# Allegro board IRCamPwr.brd
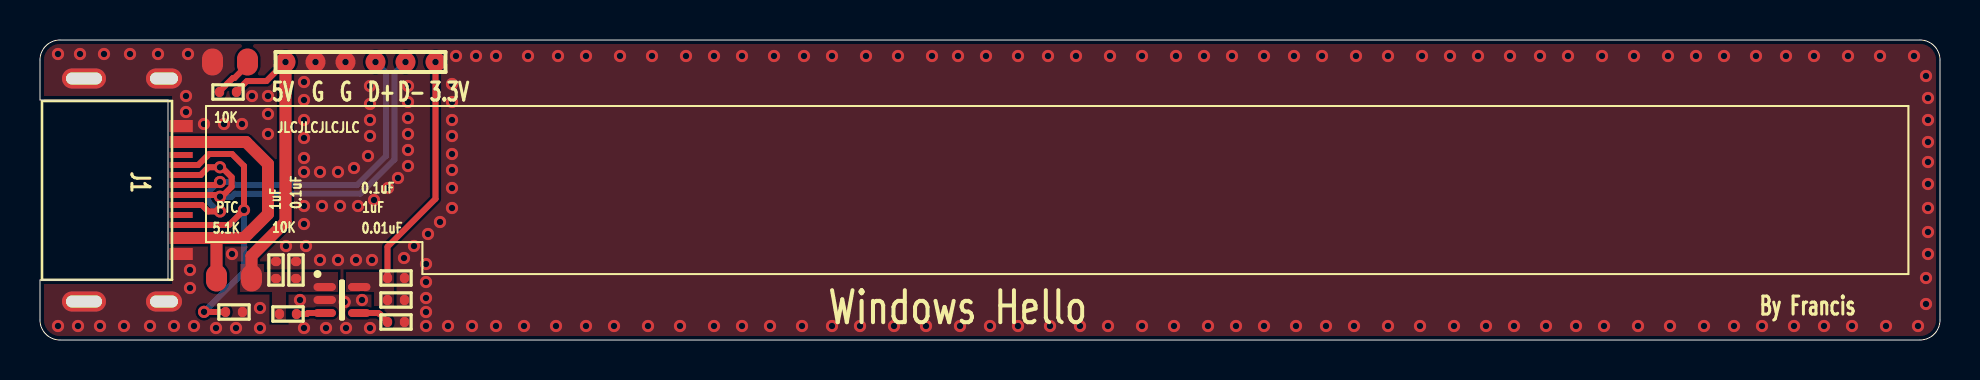
[diagram p0: board, top side]
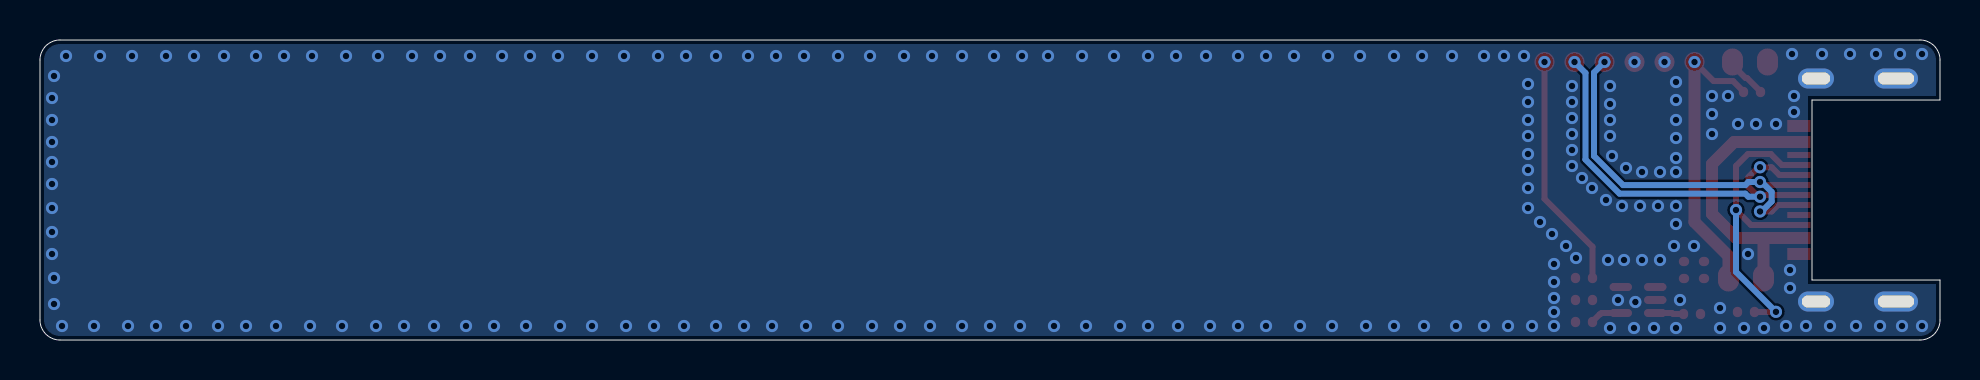
[diagram p1: board, bottom side, seen from below]

Outline 95 x 15 mm; copper layers: TOP, BOTTOM. Coordinates in mm from the lower left corner of the outline.
Outline path: 0,14 0,12 6.4,12 6.4,3 0,3 0,1 arc(0.29,0.29) 1,0 94,0 arc(94.71,0.29) 95,1 95,14 arc(94.71,14.71) 94,15 1,15 arc(0.29,14.71) 0,14

## Design rules (mm)
constraint set DEFAULT: min track width 0.127

## Placement (name value [footprint] x y rotation side)
C1  1uF  [D-0402-C]  11.8 3.5 90 top
C2  0.1uF  [D-0402-C]  12.8 3.5 90 top
C3  0.1uF  [D-0402-C]  17.8 3.1 0 top
C4  1uF  [D-0402-C]  17.8 2 0 top
C5  0.01uF  [D-0402-C]  17.8 0.9 0 top
D1  LED  [D-0805-C]  9.5 13.9 0 top
J1  TYPE-C  [TYPE-C-16PIN-CHENBAN1P6]  4.2 7.5 270 top
J2  HEADER 6  [D-PINPITCH1P5-6PIN_PAD]  12.28 13.9 180 top
R1  5.1k  [D-0402-R]  9.7 1.4 0 top
R2  10K  [D-0402-R]  9.4 12.4 0 top
R3  10K  [D-0402-R]  12.4 1.3 180 top
RT1  PTC  [D-0805-C]  9.7 3.1 0 top
U1  SGM2019-3.3  [D-SC70-5]  15.1 2 0 top

## Library data of the parts
C1-C5 = CAP NP
D1 = LED
J1 = TYPE-C_2
J2 = HEADER 6
R1-R3 = R_0
RT1 = PTC
U1 = SGM2019-3.0

## Footprints (pads in the part's own frame, mm; a bottom-side part is the same pattern mirrored in y, then rotated)
D-0402-C
  oval 0.465x0.52 smd: 1(-0.425,0) 2(0.425,0)
D-0402-R
  oval 0.465x0.52 smd: 1(-0.425,0) 2(0.425,0)
D-0805-C
  oval 1.05x1.35 smd: 1(-0.875,0) 2(0.875,0)
D-PINPITCH1P5-6PIN_PAD
  round 1 smd: 1(0,0) 2(-1.5,0) 3(-3,0) 4(-4.5,0) 5(-6,0) 6(-7.5,0)
D-SC70-5
  oval 1.125x0.4 smd: 1(-0.863,0.65) 2(-0.863,0) 3(-0.863,-0.65) 4(0.863,-0.65) 5(0.862,0.65)
TYPE-C-16PIN-CHENBAN1P6
  rect 0.6x1.15 smd: A1(-3.2,2.86) A4(-2.4,2.86) B1(3.2,2.86) B4(2.4,2.86)
  rect 0.3x1.15 smd: A5(-1.25,2.86) A6(-0.25,2.86) A7(0.25,2.86) A8(1.25,2.86) B5(1.75,2.86) B6(0.75,2.86) B7(-0.75,2.86) B8(-1.75,2.86)
  oval 1x1.8 hole 0.6x1.4: M1(-5.575,2) M2(5.575,2)
  oval 1x2.2 hole 0.6x1.8: M3(-5.575,-2) M4(5.575,-2)

## Nets
GND: C1.2 C2.2 C3.2 C4.2 C5.2 D1.1(CATHODE) J1.A1 J1.B1 J1.M1 J1.M2 J1.M3 J1.M4 J2.2 J2.3 R1.2 U1.2
VBUS: J1.A4 J1.B4(VBUS2) RT1.1
VCC3V3: C3.1 C4.1 J2.6 U1.5(OUT)
VCC5: C1.1 C2.1 J2.1 R2.2 R3.2 RT1.2 U1.1
CC: J1.A5 J1.B5 R1.1
D+: J1.A6 J1.B6 J2.4
D-: J1.A7 J1.B7 J2.5
N642090: R3.1 U1.3
N642094: C5.1 U1.4
N6603590: D1.2 R2.1

Pads without a net: J1 A8 B8

## Via types
v1: diameter 0.61, hole 0.33, TOP to BOTTOM, 208 vias

## Routing (per net, layer and track width the routed paths; a pad name or vN(x,y) marks a point on that pad's centre or on a via; arc(x,y) is an arc through that point)
GND:
  vias: v1(0.9,14.3) v1(0.9,0.7) v1(1.9,0.7) v1(2,14.3) v1(3,0.7) v1(3.2,14.3) v1(4.2,0.7) v1(4.5,14.3) v1(5.5,0.7) v1(5.9,14.3) v1(6.7,0.7) v1(7.3,12.2) v1(7.3,11.4) v1(7.4,14.3) v1(7.5,3.5) v1(7.5,2.6) v1(7.7,0.7) v1(8.2,10.8) v1(8.8,0.6) v1(9.2,10.8) v1(9.6,4.3) v1(9.8,0.6) v1(10.1,10.8) v1(10.6,12.2) v1(11,1.6) v1(11,0.6) v1(11.4,12.2) v1(11.4,11.3) v1(11.4,10.3) v1(12.3,4.7) v1(13,2) v1(13.2,12.9) v1(13.2,12) v1(13.2,11) v1(13.2,10.1) v1(13.2,9.1) v1(13.2,8.4) v1(13.2,6.7) v1(13.2,5.8) v1(13.2,0.6) v1(13.3,4.7) v1(13.78,13.9) v1(14,8.4) v1(14,4) v1(14.1,6.7) v1(14.3,0.6) v1(14.9,8.4) v1(14.9,4) v1(15,6.7) v1(15.23,1.9) v1(15.28,13.9) v1(15.3,0.6) v1(15.7,8.6) v1(15.8,4) v1(15.9,6.7) v1(16.1,2) v1(16.4,9.2) v1(16.5,12.7) v1(16.5,11.8) v1(16.5,11) v1(16.5,10.2) v1(16.5,0.6) v1(16.6,4) v1(16.7,7) v1(17.4,7.6) v1(17.9,8.1) v1(18.2,4.1) v1(18.4,12.7) v1(18.4,11.9) v1(18.4,11.1) v1(18.4,10.3) v1(18.4,9.5) v1(18.4,8.7) v1(18.7,4.7) v1(19.3,3.8) v1(19.3,2.9) v1(19.3,2.1) v1(19.3,1.4) v1(19.3,0.7) v1(19.4,5.3) v1(20,5.9) v1(20.4,0.7) v1(20.6,12.8) v1(20.6,11.9) v1(20.6,11) v1(20.6,10.2) v1(20.6,9.3) v1(20.6,8.5) v1(20.6,7.6) v1(20.6,6.6) v1(20.8,14.2) v1(21.6,0.7) v1(21.8,14.2) v1(22.8,14.2) v1(22.8,0.7) v1(24.2,0.7) v1(24.4,14.2) v1(25.8,0.7) v1(25.9,14.2) v1(27.3,14.2) v1(27.3,0.7) v1(28.7,0.7) v1(29,14.2) v1(30.4,0.7) v1(30.6,14.2) v1(32,0.7) v1(32.3,14.2) v1(33.7,14.2) v1(33.7,0.7) v1(35.1,14.2) v1(35.1,0.7) v1(36.5,0.7) v1(36.7,14.2) v1(38.1,0.7) v1(38.2,14.2) v1(39.6,14.2) v1(39.6,0.7) v1(41,0.7) v1(41.3,14.2) v1(42.7,0.7) v1(42.9,14.2) v1(44.3,0.7) v1(44.6,14.2) v1(45.9,14.2) v1(46,0.7) v1(47.3,14.2) v1(47.5,0.7) v1(48.9,14.2) v1(48.9,0.7) v1(50.4,14.2) v1(50.5,0.7) v1(51.8,14.2) v1(52,0.7) v1(53.4,0.7) v1(53.5,14.2) v1(55.1,14.2) v1(55.1,0.7) v1(56.7,0.7) v1(56.8,14.2) v1(58.2,14.2) v1(58.4,0.7) v1(59.6,14.2) v1(59.8,0.7) v1(61.2,14.2) v1(61.2,0.7) v1(62.7,14.2) v1(62.8,0.7) v1(64.1,14.2) v1(64.3,0.7) v1(65.7,0.7) v1(65.8,14.2) v1(67.4,14.2) v1(67.4,0.7) v1(69,0.7) v1(69.1,14.2) v1(70.5,14.2) v1(70.7,0.7) v1(71.9,14.2) v1(72.3,0.7) v1(73.5,14.2) v1(73.7,0.7) v1(75,14.2) v1(75.3,0.7) v1(76.4,14.2) v1(76.8,0.7) v1(78.1,14.2) v1(78.2,0.7) v1(79.7,14.2) v1(79.9,0.7) v1(81.4,14.2) v1(81.5,0.7) v1(82.8,14.2) v1(83.2,0.7) v1(84.2,14.2) v1(84.7,0.7) v1(85.8,14.2) v1(86.1,0.7) v1(87.3,14.2) v1(87.7,0.7) v1(88.7,14.2) v1(89.2,0.7) v1(90.4,14.2) v1(90.6,0.7) v1(92,14.2) v1(92.3,0.7) v1(93.7,14.2) v1(93.9,0.7) v1(94.3,13.2) v1(94.3,3.1) v1(94.3,1.8) v1(94.4,12.1) v1(94.4,11) v1(94.4,9.9) v1(94.4,8.9) v1(94.4,7.8) v1(94.4,6.6) v1(94.4,5.4) v1(94.4,4.3)
VBUS: length 14.1
  TOP w0.6: J1.A4 10.3,9.9 11.4,8.8 11.4,6.3 10.2,5.1 8.82,5.1 ; J1.B4 8.82,5.1 ; 8.82,5.1 RT1.1
VCC3V3: length 11.8
  TOP w0.3: C3.1 17.38,4.66 19.77,7.06 v1(19.77,13.9)
VCC5: length 14.6
  TOP w0.3: 9.82,12.4 9.82,12.43 10.35,12.95 11.32,12.95 v1(12.28,13.9)
  TOP w0.6: v1(12.28,13.9) 12.28,5.9 10.57,4.2 RT1.2
CC: length 16.3
  TOP w0.3: v1(8.2,1.41) 8.21,1.4 8.71,1.4 8.72,1.4 9.28,1.4 ; J1.A5 7.91,8.75 8.46,9.3 9.6,9.3 10.2,8.7 v1(10.2,6.5) 9.45,5.75 J1.B5
  BOTTOM w0.3: v1(8.2,1.41) 10.2,3.41 v1(10.2,6.5)
D+: length 20
  TOP w0.3: J1.B6 8.1,6.75 8.42,6.43 v1(9,6.43) ; J1.A6 8.85,7.75 v1(9,7.9)
  BOTTOM w0.3: v1(9,6.43) 8.91,6.43 8.42,6.92 8.42,7.4 8.91,7.9 v1(9,7.9) 9.58,7.9 9.74,7.75 15.85,7.75 17.3,9.2 17.3,13.38 v1(16.77,13.9)
D-: length 20.7
  TOP w0.3: J1.A7 8.91,7.25 v1(9,7.16) 9.09,7.16 9.58,7.66 9.58,8.14 9.09,8.64 v1(9,8.64) 8.42,8.64 8.03,8.25 J1.B7
  BOTTOM w0.3: v1(18.27,13.9) 17.73,13.35 17.73,9.02 16.02,7.32 9.74,7.32 9.58,7.16 v1(9,7.16)
N642090: length 1.4
  TOP w0.3: 12.82,1.3 13.35,1.3 13.4,1.35 U1.3
N642094: length 1.6
  TOP w0.3: C5.1 17.38,0.93 17.01,1.29 16.99,1.29 16.93,1.35 U1.4
N6603590: length 2.1
  TOP w0.3: D1.2 10.38,13.75 9.72,13.1 9.65,13.1 8.97,12.43 R2.1

## Copper pours and planes (outline as drawn; the poured copper is in the pictures)
GND on TOP: 0.2,14 0.43,14.57 1,14.8 94,14.8 94.57,14.57 94.8,14 94.8,1 94.57,0.43 94,0.2 1,0.2 0.43,0.43 0.2,1 0.2,2.8 6.6,2.8 6.6,12.2 0.2,12.2 ; 2 cut-outs
GND on BOTTOM: 0.2,14 0.43,14.57 1,14.8 94,14.8 94.57,14.57 94.8,14 94.8,1 94.57,0.43 94,0.2 1,0.2 0.43,0.43 0.2,1 0.2,2.8 6.6,2.8 6.6,12.2 0.2,12.2
VCC3V3 on TOP: 17.7,3.4 17.7,1.7 16.7,1.7 16.7,2.4 15.3,2.4 15.3,3.4
VCC5 on TOP: 14.9,2.4 14.9,3.4 11.2,3.4 11.2,3.8 10,3.8 10,2.4 11.6,2.4 11.6,0.9 12.3,0.9 12.3,2.4

## Text on the board
Ref Des/Silkscreen Top: 5.1K | 10K | PTC | JLCJLCJLCJLC | 0.1uF | 0.01uF | 1uF | 5V | G | D+ | D- | 3.3V | By Francis | Windows Hello
